# Altium PCB MB1075.PcbDoc (part 2 of 4)
Units mm, origin at the board's own origin, x right, y up, seen from the top; angles counter-clockwise.
Board outline 66 x 119.3 mm, 4 copper layers (TOP, L2, L3, Bottom), stack 1.548 mm thick; 196 components, 219 nets, 897 pads, 500 vias.
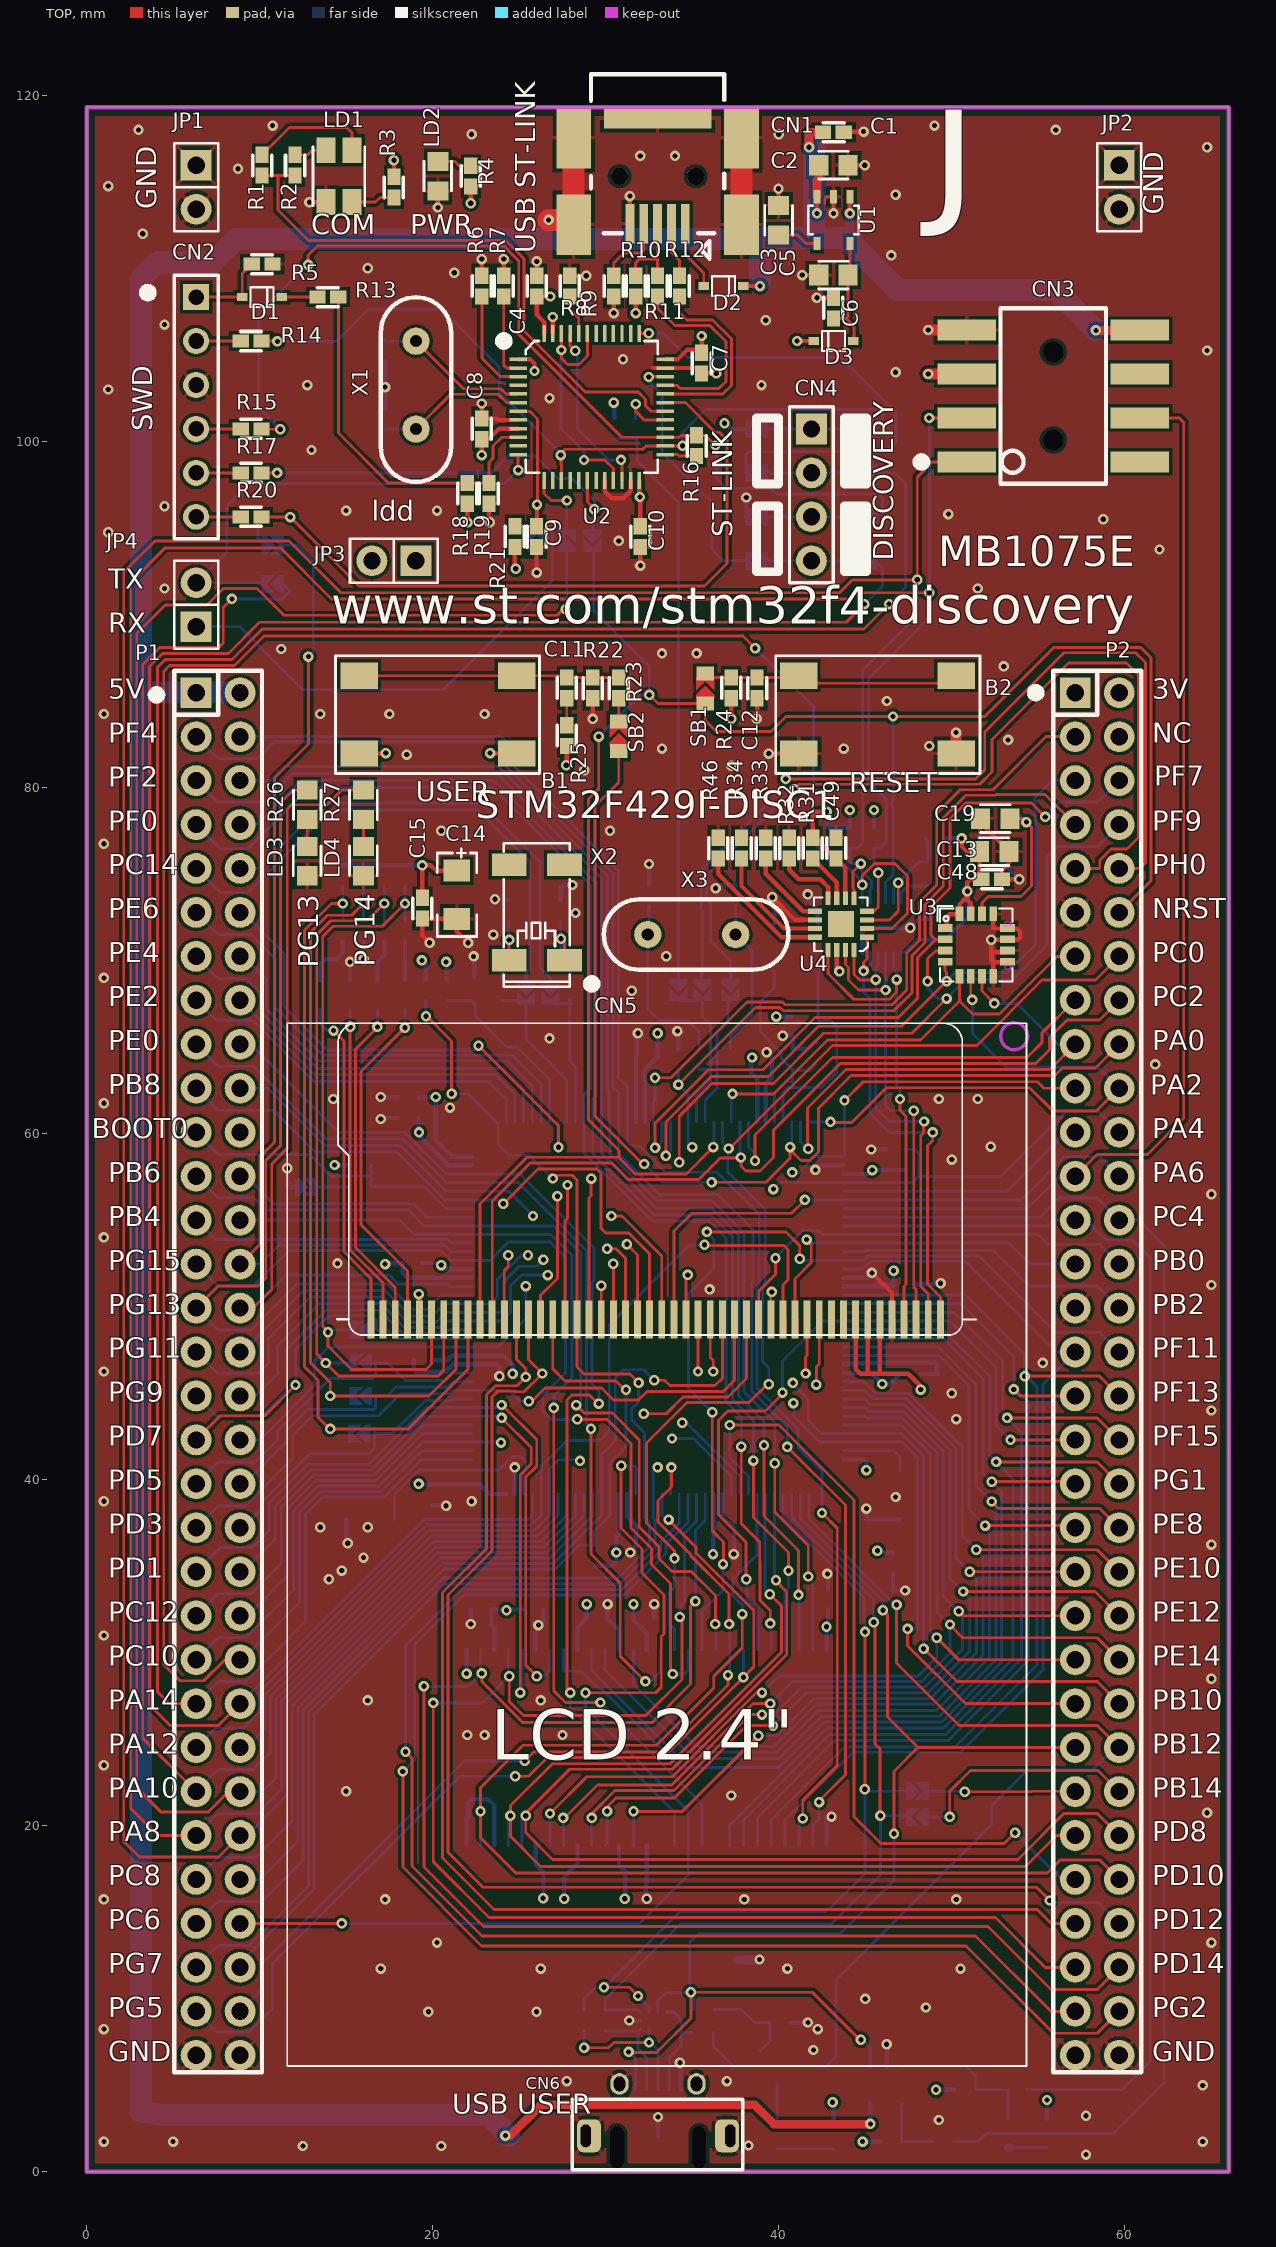
[diagram p0: TOP view]

## Via types
v1: diameter 0.6, hole 0.3, TOP to Bottom, 375 vias
v2: diameter 0.6, hole 0.3, TOP to Bottom, tented both sides, 125 vias

## Nets (pads, with @x,y where several pads share a name; then routed paths per layer and width w, separated by ;. In a path a pad name is that pad's centre, name@x,y a point inside that pad or via, vN(x,y) a via of type N, cw(c..) or ccw(c..) an arc to the next point about the centre after c; other vN are vias at no path point) (continued)
D7: (continued)
  Bottom w0.165: U6.13@31.565,30.17 31.603,30.17 31.603,28.2 35.202,24.601 39.74,24.601 42.171,27.032 48.974,27.032 51.796,29.854 51.796,35.569 v1(51.415,35.95) 50.6,36.765 50.6,41.9 47.503,44.997 45.584,44.997 44.91,45.67 U5.63@43.75,45.67
D8: P2.41 U5.64 U6.42 | length 51.9
  TOP w0.165: v1(31.603,20.837) 34.444,20.837 v1(38.814,25.207) ; v1(51.034,34.68) P2.41@57.13,34.68
  Bottom w0.165: U6.42@31.565,18.87 31.603,18.87 v1(31.603,20.837) ; v1(38.814,25.207) 39.886,25.207 42.027,27.348 48.782,27.348 51.415,29.981 51.415,34.299 v1(51.034,34.68) 50.25,35.464 50.25,41.8 47.369,44.681 45.435,44.681 44.946,45.17 U5.64@43.75,45.17